# Altium PCB PCB1.PcbDoc
Units mm, origin at the board's own origin, x right, y up, seen from the top; angles counter-clockwise.
Board outline 26 x 34 mm, 2 copper layers (Top Layer, Bottom Layer); 22 components, 14 nets, 98 pads, 10 vias.
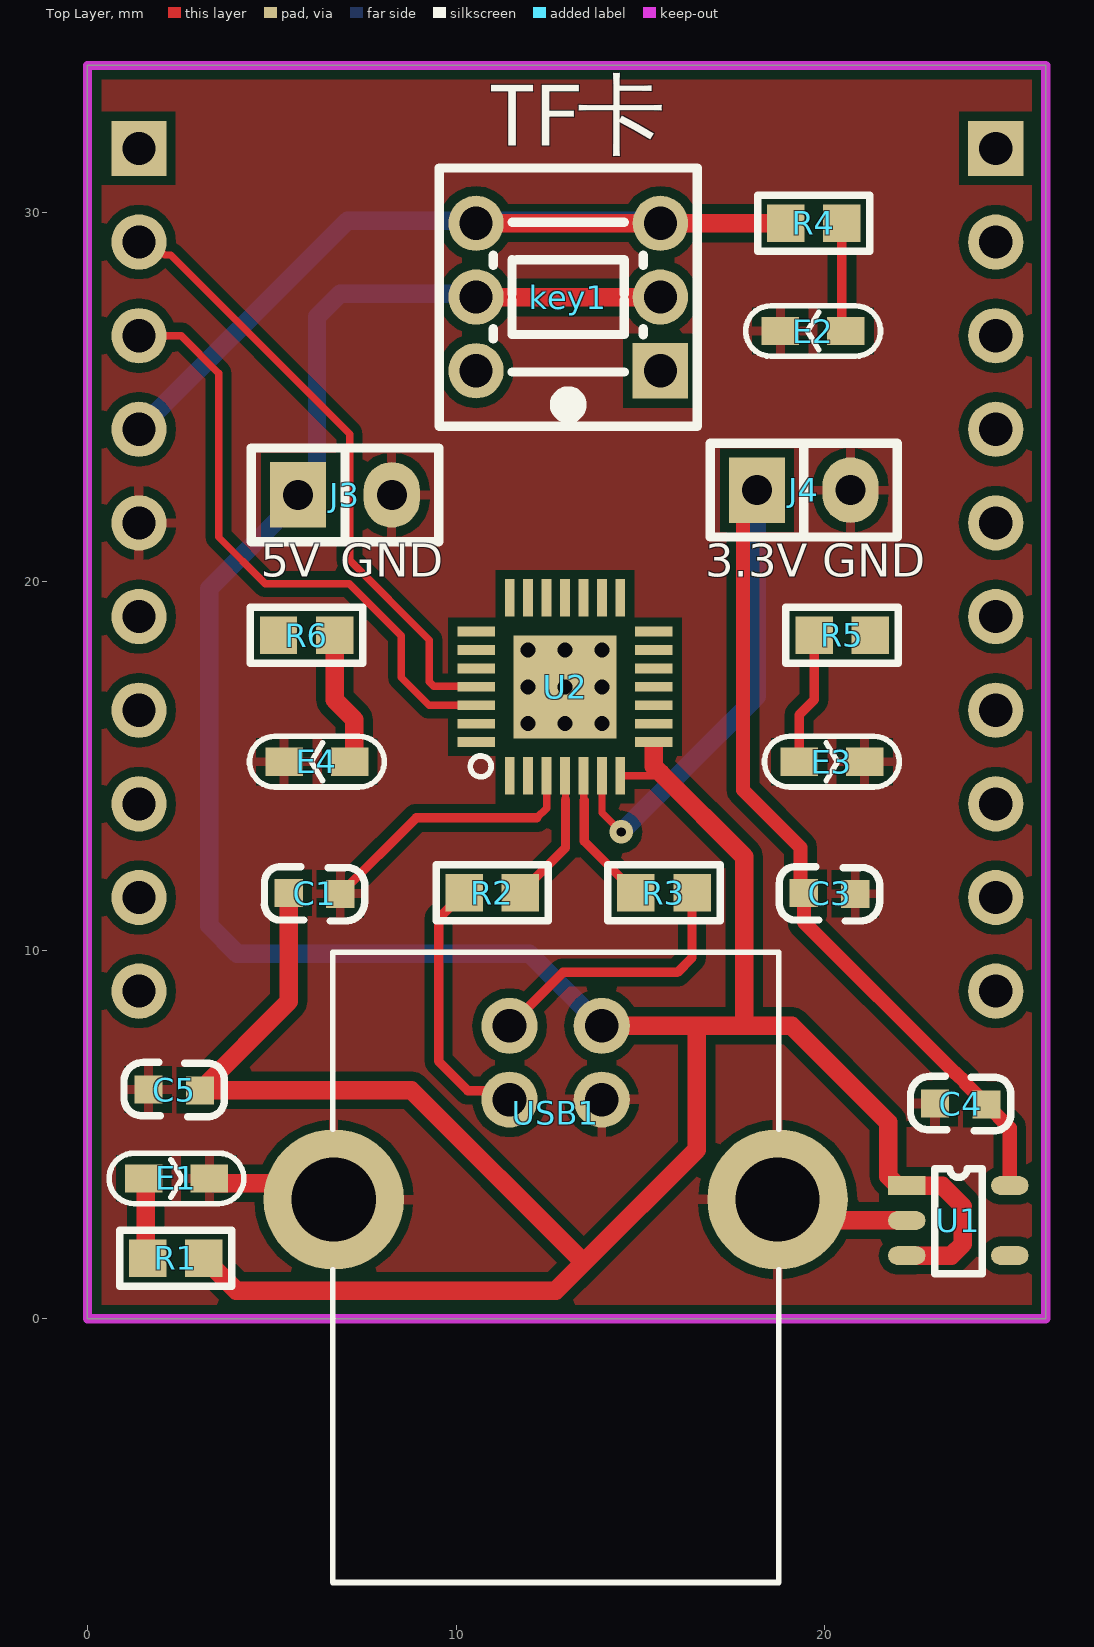
[diagram p0: Top Layer view]
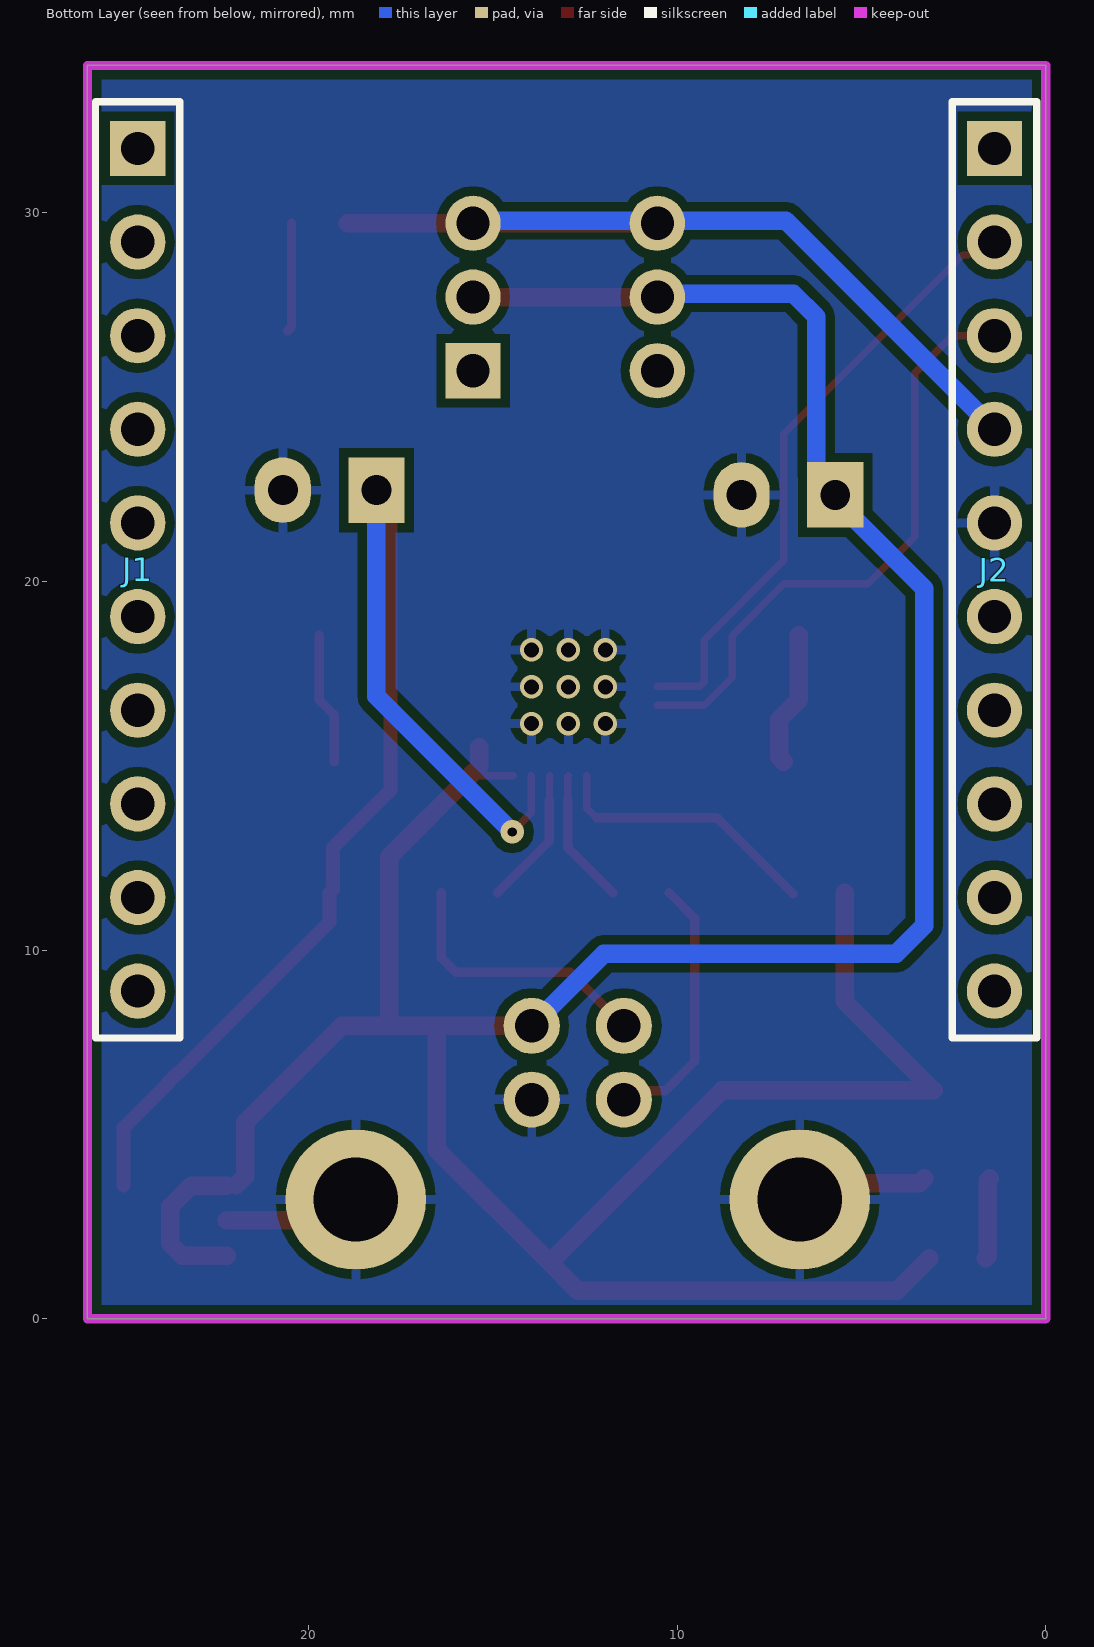
[diagram p1: Bottom Layer view, seen from below]
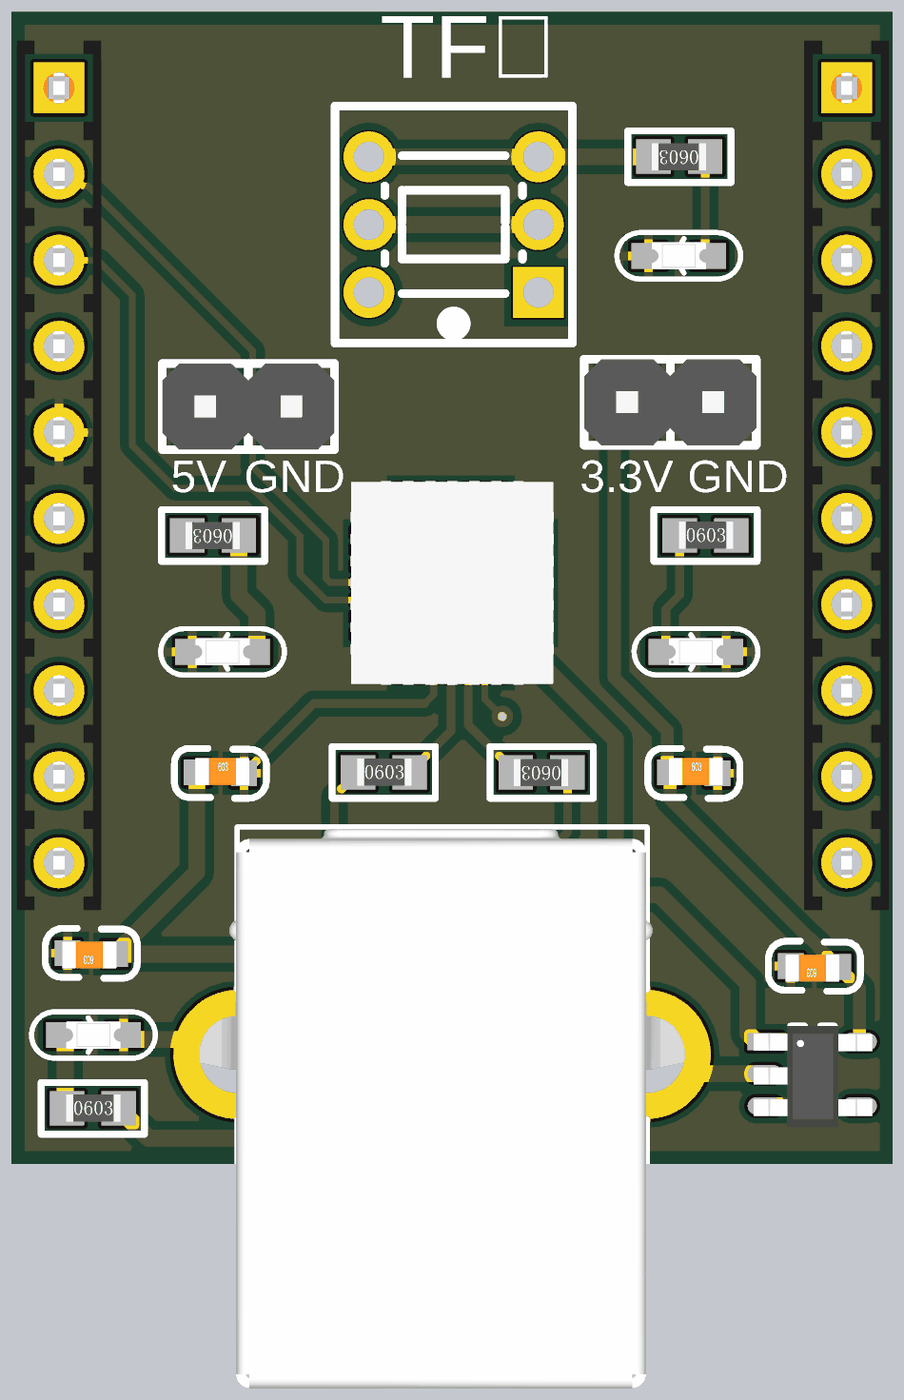
[diagram p2: 3D render of the assembled board from above, using the file's embedded part models]

## Layer stack, top to bottom
Top Solder: solder mask 0.0102, Solder Resist, Dk 3.5
Top Layer: signal copper 0.0356
Dielectric 1: dielectric 0.32, FR-4, Dk 4.8
Bottom Layer: signal copper 0.0356
Bottom Solder: solder mask 0.0102, Solder Resist, Dk 3.5

## Board outline
0,0 0,34 26,34 26,0

## Design rules (kind name [scope] priority, off if disabled: settings)
Clearance [All] p1: gap=0.254 ignorepadtopadclearanceinfootprint=TRUE except(0: Arc-Hole Track-Hole SMDPad-Hole THPad-Hole Via-Hole Fill-Hole Poly-Hole Region-Hole Text-Hole)
PolygonConnect [All] p1: connectstyle=Relief reliefconductorwidth=0.254 reliefentries=4 polygonreliefangle="90 Angle" airgapwidth=0.254
RoutingVias [All] p1: holewidth=0.711 width=1.27 viastyle="Through Hole" minholewidth=0.711 minwidth=1.27 maxholewidth=0.711 maxwidth=1.27
SolderMaskExpansion [All] p1: expansion=0.102 istentingtop=FALSE
Width [All] p1: maxlimit=1.254 minlimit=0.154 preferedwidth=0.254
30 further rules are at their usual default settings.

## Components (designator, comment, footprint, x,y, rotation, side; value= is the part's Value field where it differs from the comment)
C1 "10uF" 0603C 5.418,11.584 r0 top
C3 "10uF" 0603C 19.388,11.584 r0 top
C4 "10uF" 0603C 24.427,5.788 r180 top
C5 "10uF" 0603C 3.091,6.169 r180 top
E1 "LED" LED_0603L 1.27,3.81 r0 top
E2 "LED" LED_0603L 20.828,26.797 r180 top
E3 "LED" LED_0603L 19.05,15.113 r0 top
E4 "LED" LED_0603L 7.366,15.113 r180 top
J1 "Female HDR1X10" Fe-HDR1X10/2.54-S 24.638,31.75 r180 bottom
J2 "Female HDR1X10" Fe-HDR1X10/2.54-S 1.397,31.75 r180 bottom
J3 "Pin HDR1X2" "Pin HDR1X2/2.54mm-S" 5.715,22.352 r90 top
J4 "Pin HDR1X2" "Pin HDR1X2/2.54mm-S" 18.161,22.479 r90 top
key1 "key" SW_6P_LOCK 13.167,27.307 r180 top
R1 "120" 0603R 1.651,1.651 r0 top
R2 "120" 0603R 10.237,11.563 r0 top
R3 "120" 0603R 16.383,11.551 r180 top
R4 "120" 0603R 20.447,29.718 r180 top
R5 "120" 0603R 19.728,18.554 r0 top
R6 "120" 0603R 6.688,18.542 r180 top
U1 "SPX3819" SOT-23-5 22.225,3.617 r0 top
U2 "CP2102" QFN28 12.954,17.145 r90 top
USB1 "USB" USB-TB 12.7,1.397 r0 top

## Footprints (in the part's own frame and the unit in brackets; to place one, negate y for a bottom-side part, rotate by r counter-clockwise, add the part's x,y. Pads: shape width x height; smd on the part's side, far side on the other; paste and mask are expansions set on the pad)
0603C [mil] "0603电容"
  rect 30x30 smd: 1(1.7,-1.11) 2(56.7,-2.11)
  silkscreen extent -24,-31 83,27, body extent 0,-16 63,16, height 12
0603R [mil] "0603电阻封装"
  rect 40x40 smd: 1(-0.68,-0.23) 2(59.32,-0.23)
  silkscreen extent -31,-30 89,30, body extent -1,-16 62,16, height 18
Fe-HDR1X10/2.54-S [mm]
  rect 1.5x1.5 hole 0.9: 1(0,0)
  round 1.5 hole 0.9: 2(0,-2.54) 3(0,-5.08) 4(0,-7.62) 5(0,-10.16) 6(0,-12.7) 7(0,-15.24) 8(0,-17.78) 9(0,-20.32) 10(0,-22.86)
  silkscreen extent -1.14,-24.13 1.14,1.27, body extent -1.25,-24.25 1.25,1.4, height 3.2
LED_0603L [mil] "LED"
  rect 40x30 smd: 1(10,0) 2(80,0)
  silkscreen extent -27,-27 117,27, body extent 14,-16 77,16, height 24
"Pin HDR1X2/2.54mm-S" [mil]
  rect 70x60 hole 32: 1(0,0)
  oval 70x60 hole 32: 2(0,-100)
  silkscreen extent -50,-150 50,50, body extent -50,-150 50,50, height 336
QFN28 [mil] "QFN28"
  rect 40x10.5 smd: 1(-95,59.06) 2(-95,39.37) 3(-95,19.69) 4(-95,0) 5(-95,-19.68) 6(-95,-39.37) 7(-95,-59.05) 15(95,59.06) 16(95,39.37) 17(95,19.69) 18(95,0) 19(95,-19.68) 20(95,-39.37) 21(95,-59.05)
  rect 110x110 smd: 3(0,0)
  rect 10.5x40 smd: 8(-59.06,-95) 9(-39.37,-95) 10(-19.68,-95) 11(0,-95) 12(19.69,-95) 13(39.37,-95) 14(59.06,-95) 22(59.06,95) 23(39.37,95) 24(19.69,95) 25(0,95) 26(-19.68,95) 27(-39.37,95) 28(-59.06,95)
  silkscreen extent -96,79 -74,101, body extent -118,-120 118,116, height 40
SOT-23-5 [mil] "SPX3819"
  rect 40x20 smd: 1(0,0)
  oval 40x20 smd: 2(0,-37.4) 3(0,-74.8) 4(110,-74.8) 5(110,0)
  silkscreen extent 30,-94 81,18, body extent -13,-100 125,18, height 43
SW_6P_LOCK [mm] "6pin自锁开关"
  rect 1.5x1.5 hole 0.9 mask+0.05: 1(-2.374,1.589)
  round 1.5 hole 0.9 mask+0.05: 2(-2.374,-0.411) 3(-2.374,-2.411) 4(2.626,1.589) 5(2.626,-0.411) 6(2.626,-2.411)
  silkscreen extent -3.37,-3.91 3.63,3.09
USB-TB [mil] "USB2.0 Type-B接口"
  round 60 hole 36: 1(49.21,257.87) 2(-49.22,257.87) 3(-49.22,179.13) 4(49.21,179.13)
  round 150 hole 90: 5(-237.01,72.44) 6(237.01,72.44)
  silkscreen extent -238,-337 238,337, body extent -293,-315 290,335, height 433

## Part data
C1 C3 C4 C5: library part "CAP Nonpolarity", "无极电容"
E1 E2 E3 E4: "LED灯"
key1: library part SW_6pin_Lock, "6pin自锁开关"
R1 R2 R3 R4 R5 R6: library part R, "电阻"
U1: "稳压器"
U2: "usb转usart"

## Via types
v1: diameter 0.635, hole 0.406, Top Layer to Bottom Layer, 9 vias
v2: diameter 0.635, hole 0.254, Top Layer to Bottom Layer, tented both sides, 1 vias

## Nets (pads, with @x,y where several pads share a name; then routed paths per layer and width w, separated by ;. In a path a pad name is that pad's centre, name@x,y a point inside that pad or via, vN(x,y) a via of type N, cw(c..) or ccw(c..) an arc to the next point about the centre after c; other vN are vias at no path point)
CP2102_RXD: J2.2 U2.25 | length 16.8
  Top Layer w0.2: J2.2 1.749,29.21 2.101,28.858 2.257,28.858 2.54,28.575 7.112,24.003 7.112,20.574 9.271,18.415 9.271,17.279 9.392,17.158 10.528,17.158 U2.25
CP2102_TXD: J2.3 U2.26 | length 16.6
  Top Layer w0.2: J2.3 2.54,26.67 3.556,25.654 3.556,21.209 4.826,19.939 7.105,19.939 8.509,18.535 8.509,17.399 9.263,16.645 U2.26
GND: C1.2 C3.2 C4.2 C5.2 E1.2 E2.2 E3.2 E4.2 J2.5 J3.2 J4.2 U1.2 U2.3 USB1.4 USB1.5 USB1.6 | length 14.8
  Top Layer w0.2: 12.192,13.589 12.454,13.851 U2.3@12.454,14.732
  Top Layer w0.254: C1.2 8.917,13.589 12.192,13.589
  Top Layer w0.5: E1.2 3.433,3.679 6.238,3.679 USB1.5 ; USB1.6 19.289,2.669 22.223,2.669 U1.2
  other v1: 11.954,16.145 12.954,16.145 13.954,16.145 11.954,17.145 12.954,17.145 13.954,17.145 11.954,18.145 12.954,18.145 13.954,18.145
NetE1_1: E1.1 R1.1 | length 2.2
  Top Layer w0.5: E1.1 1.579,3.755 1.579,1.7 R1.1
NetE2_1: E2.1 R4.1 | length 3
  Top Layer w0.254: R4.1 20.464,26.907 E2.1
NetE3_1: E3.1 R5.1 | length 3.6
  Top Layer w0.254: E3.1 19.304,16.383 19.71,16.789 R5.1
NetE4_1: E4.1 R6.1 | length 3.7
  Top Layer w0.5: R6.1 6.706,16.789 7.239,16.256 7.239,15.24 E4.1
NetR2_2: R2.2 U2.4 | length 3.7
  Top Layer w0.2: U2.4 12.967,14.719 12.967,14.081 12.968,14.079
  Top Layer w0.254: R2.2 12.968,12.782 12.968,14.079
NetR3_2: R3.2 U2.5 | length 3.8
  Top Layer w0.2: U2.5 13.467,14.719 13.467,14.071 13.476,14.061
  Top Layer w0.254: 13.476,14.061 13.476,12.957 R3.2
power-5v: J2.4 key1.3 key1.6 R4.2 | length 25
  Top Layer w0.254: R4.2@18.876,29.788 R4.2
  Top Layer w0.5: key1.6 key1.3 15.544,29.721 18.937,29.721 R4.2
  Bottom Layer w0.5: J2.4 7.055,29.788 key1.3@15.541,29.788
USB_5V: C1.1 C5.1 J3.1 key1.2 key1.5 R1.2 U1.1 U1.3 U2.7 U2.8 USB1.1 | length 101.6
  Top Layer w0.2: U2.7 15.494,14.732
  Top Layer w0.254: 15.494,14.732 15.557,14.795
  Top Layer w0.381: U1.1@21.971,3.617 U1.1
  Top Layer w0.5: R1.2 4.041,0.762 12.7,0.762 13.462,1.524 ; C1.1 5.461,8.611 C5.1 8.788,6.198 13.462,1.524 ; key1.5 key1.2 ; USB1.1 16.527,7.947 ; 15.367,15.508 15.367,14.986 15.557,14.795 17.815,12.538 17.815,7.947 ; U1.1@21.971,3.617 21.717,3.871 21.717,5.334 19.104,7.947 17.815,7.947 ; U1.3 23.434,1.717 23.749,2.032 23.749,3.048 23.184,3.613 22.229,3.613 U1.1 ; 13.462,1.524 16.527,4.589 16.527,7.947 ; 16.527,7.947 17.815,7.947
  Bottom Layer w0.5: key1.5 10.446,27.813 6.858,27.813 6.227,27.182 6.227,22.864 J3.1 5.715,22.225 3.302,19.812 3.302,10.668 4.064,9.906 11.991,9.906 USB1.1
USB_DM: R3.1 USB1.2 | length 7.5
  Top Layer w0.254: USB1.2 12.901,9.398 16.002,9.398 16.4,9.796 R3.1
USB_DP: R2.1 USB1.3 | length 7.2
  Top Layer w0.254: R2.1 9.525,10.863 9.525,6.985 10.32,6.19 11.207,6.19 USB1.3
VCC3.3: C3.1 C4.1 J4.1 U1.5 U2.6 | length 34.6
  Top Layer w0.2: U2.6 13.957,14.729 13.957,13.729 v2(14.478,13.208)
  Top Layer w0.381: J4.1 17.78,22.098 17.78,14.351 19.345,12.786 19.345,11.641 C3.1 19.431,10.77 23.533,6.667 23.552,6.667 23.812,6.407 23.812,6.388 C4.1 25.019,5.182 U1.5
  Bottom Layer w0.5: v2(14.478,13.208) 18.161,16.891 J4.1
pads on no net: J1.1 J1.2 J1.3 J1.4 J1.5 J1.6 J1.7 J1.8 J1.9 J1.10 J2.1 J2.6 J2.7 J2.8 J2.9 J2.10 key1.1 key1.4 R5.2 R6.2 U1.4 U2.1 U2.2 U2.9 U2.10 U2.11 U2.12 U2.13 U2.14 U2.15 U2.16 U2.17 U2.18 U2.19 U2.20 U2.21 U2.22 U2.23 U2.24 U2.27 U2.28

## Polygon pours and split planes (outlines as drawn)
GND on Top Layer "GND_L01_P000" (solid, pour order 0): 0,34 26,34 26,0 0,0
GND on Bottom Layer "GND_L02_P001" (solid, pour order 1): 0,0 26,0 25.999,0.001 25.999,34 0,34

## Keep-outs
Keep-Out Layer:
  the board outline again, w0.254

## Silkscreen, mask and mechanical layers (free items; w line width, h text height)
Top Overlay:
  text "TF卡" at 10.922,31.242 h3
  text "5V" at 4.699,19.829 h1.52
  text "GND" at 6.858,19.829 h1.52
  text "3.3V" at 16.764,19.829 h1.52
  text "GND" at 19.939,19.829 h1.52